# Altium PCB PCB1.PcbDoc
Units mil, origin at the board's own origin, x right, y up, seen from the top; angles counter-clockwise.
Board outline 6000 x 4000 mil, 2 copper layers (Top Layer, Bottom Layer); 18 components, 11 nets, 56 pads, 5 vias.
Unrouted connection lines stored in the file: 17.
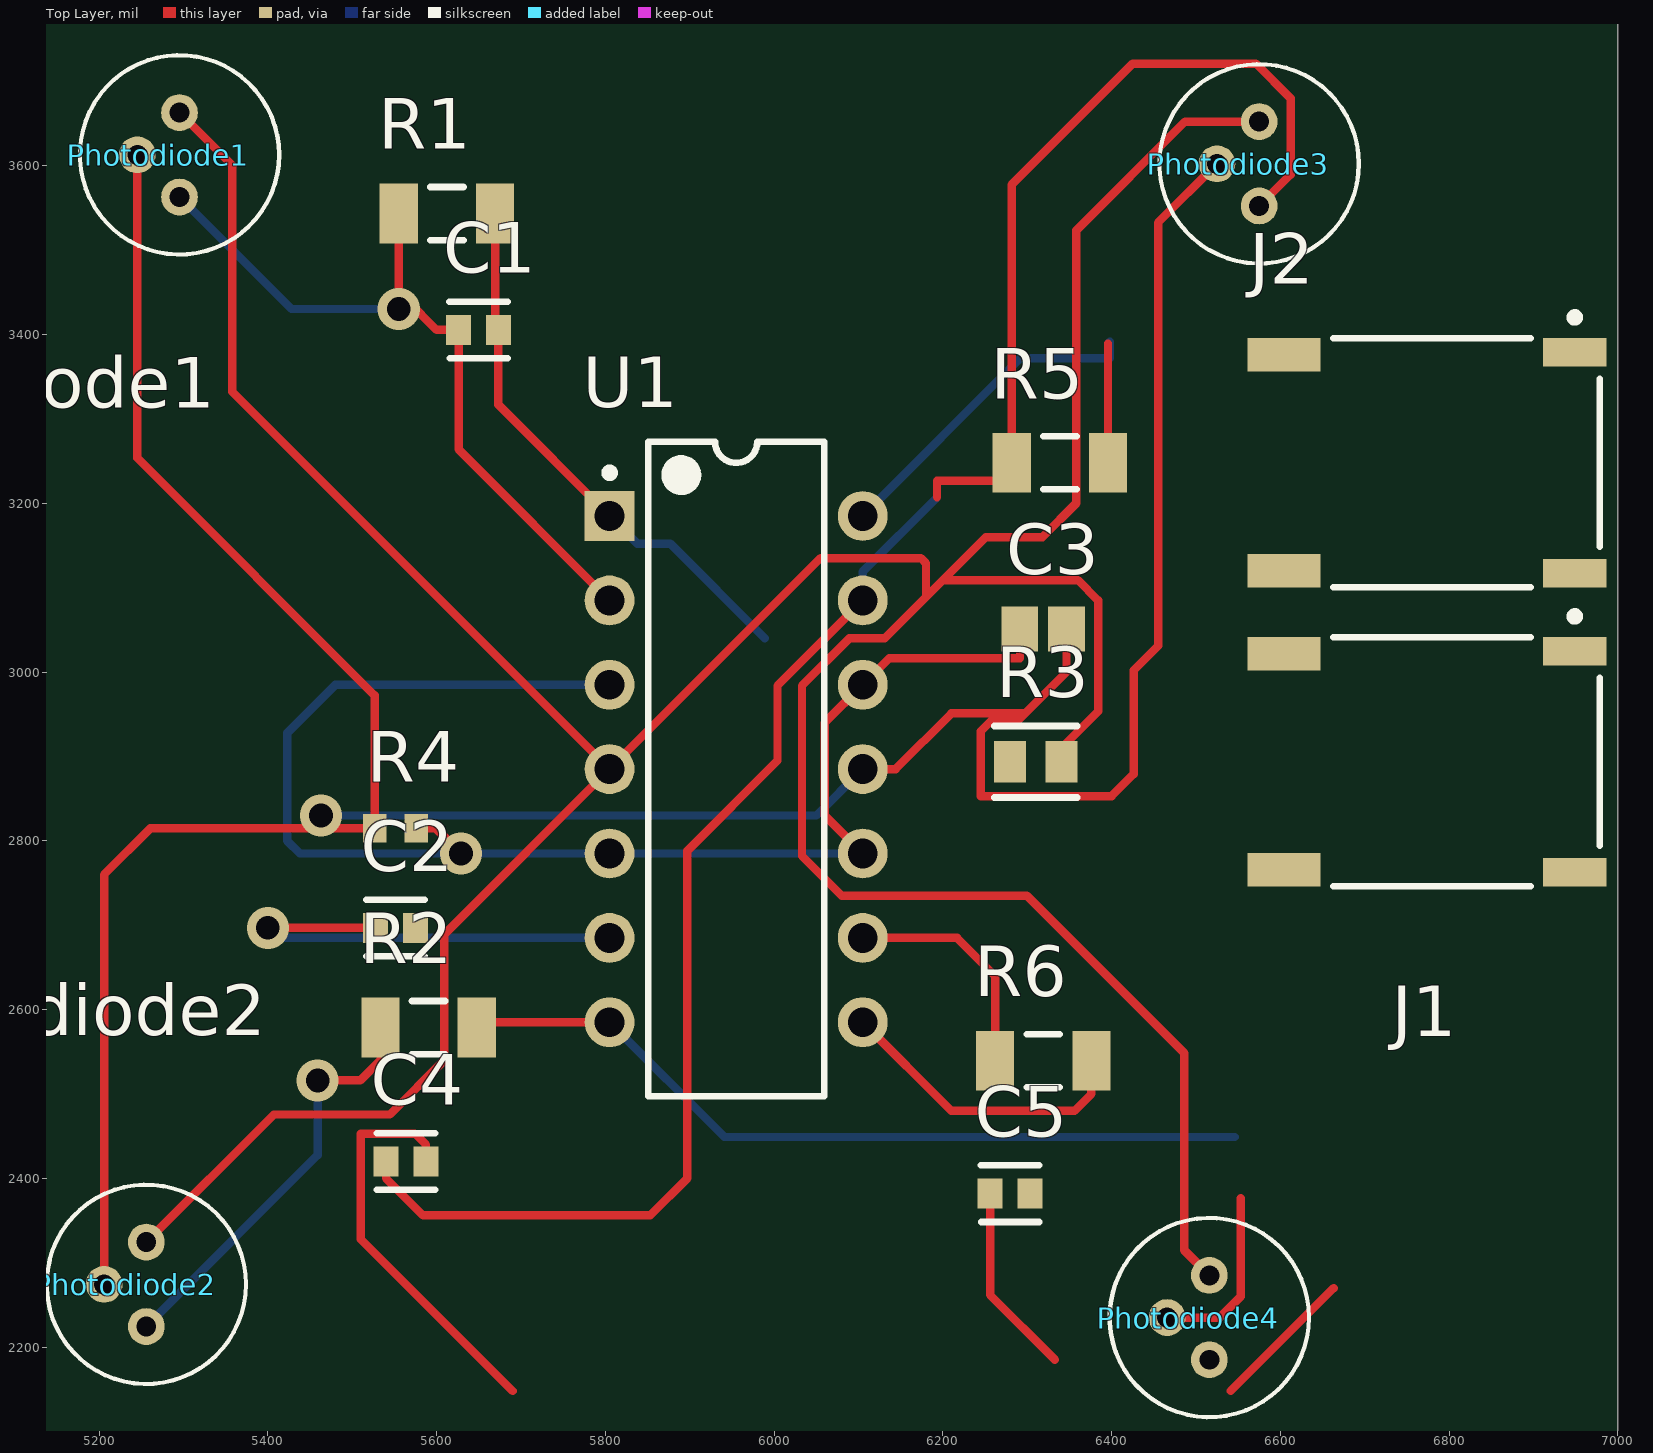
[diagram p0: Top Layer view]
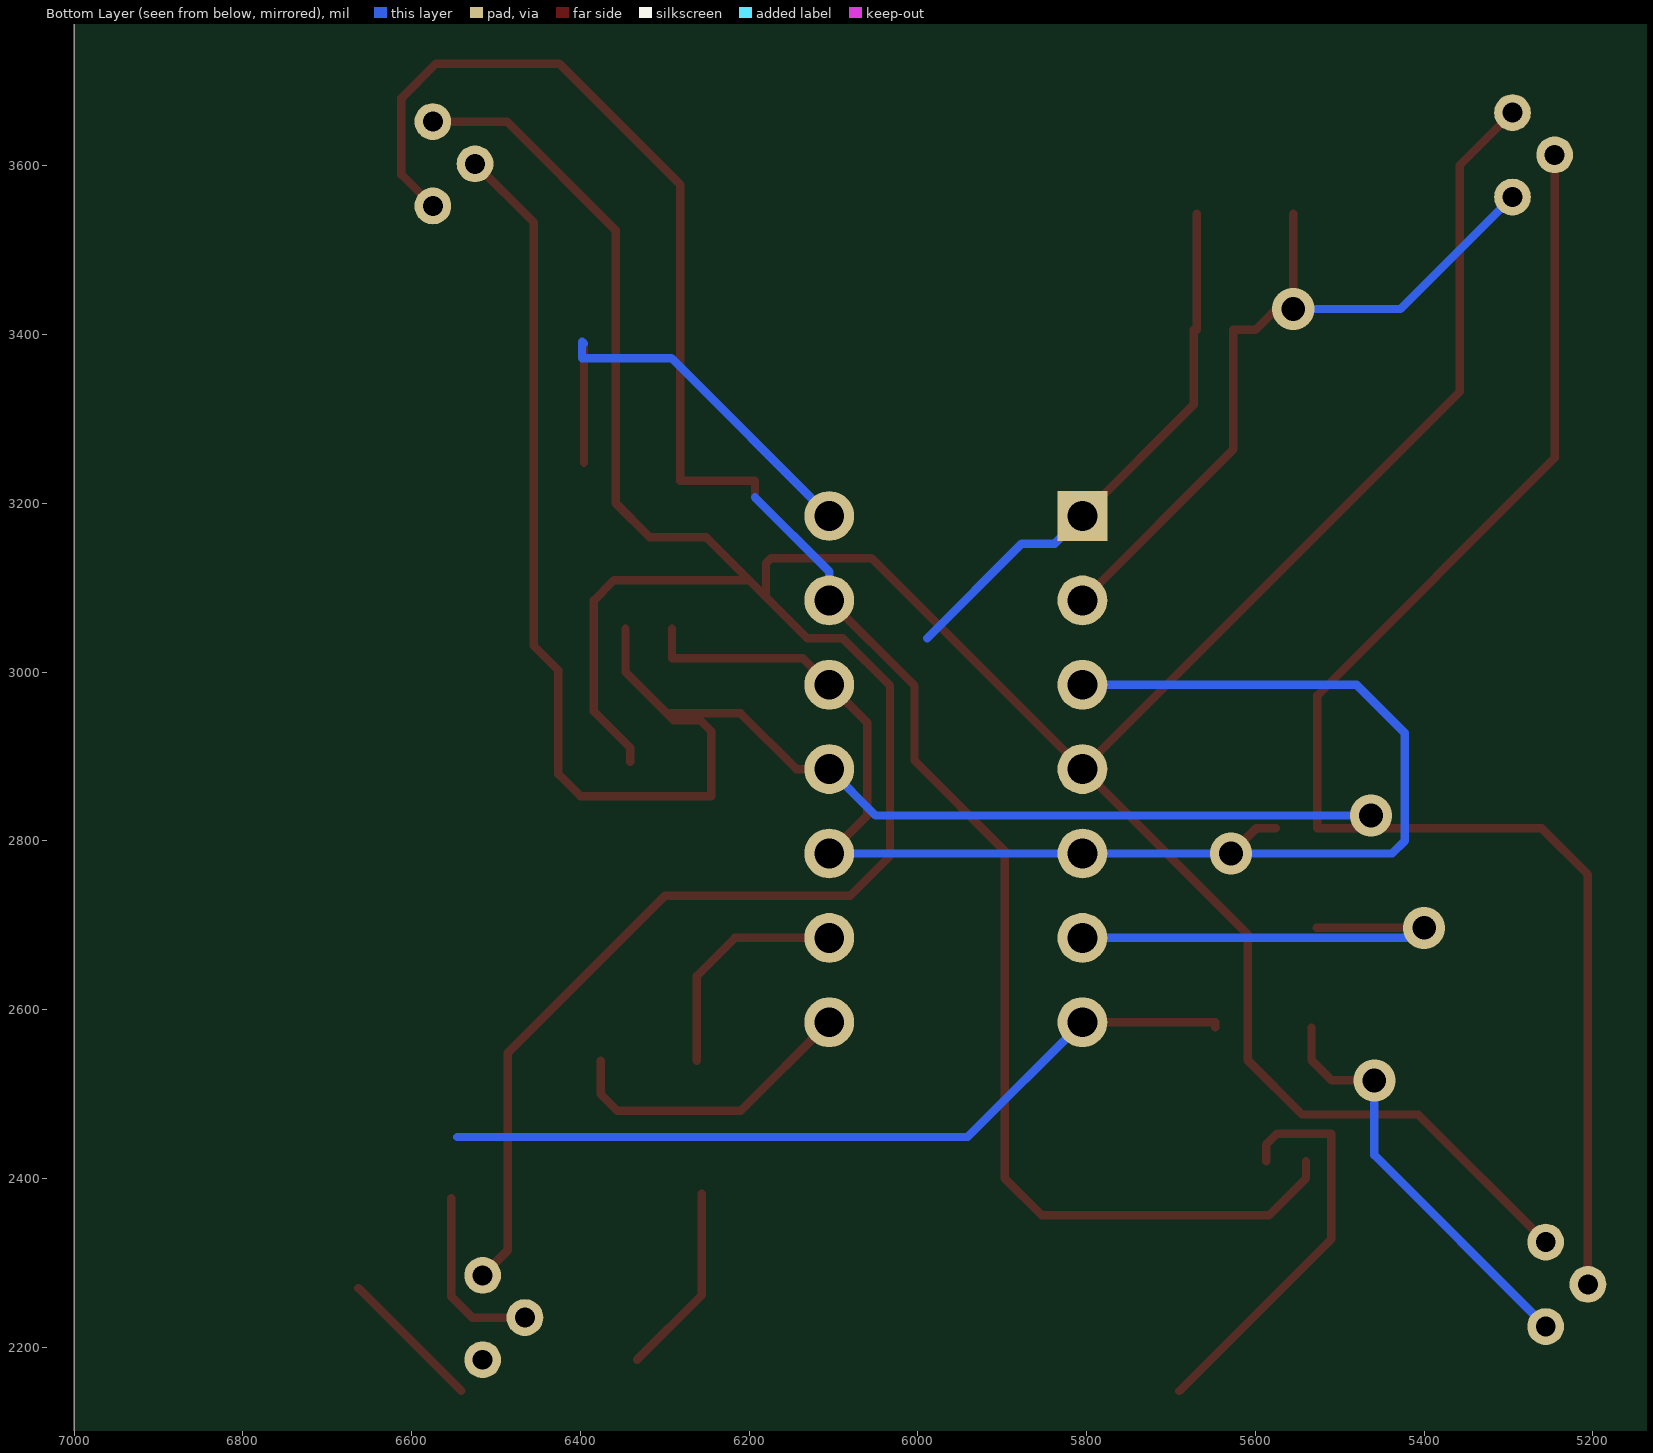
[diagram p1: Bottom Layer view, seen from below]

## Layer stack, top to bottom
Top Solder: solder mask 0.4, Solder Resist, Dk 3.5
Top Layer: signal copper 1.4
Dielectric 1: dielectric 12.6, FR-4, Dk 4.8
Bottom Layer: signal copper 1.4
Bottom Solder: solder mask 0.4, Solder Resist, Dk 3.5

## Board outline
1000,1000 7000,1000 7000,5000 1000,5000

## Design rules (kind name [scope] priority, off if disabled: settings)
Clearance [All] p1: gap=10 ignorepadtopadclearanceinfootprint=FALSE
ComponentClearance [All] p1 off: gap=0 collisioncheckmode=3 verticalgap=0 showdistances=FALSE
Height [All] p1 off: minheight=0 maxheight=1000 prefheight=500
PolygonConnect [All] p1: connectstyle=Relief reliefconductorwidth=10 reliefentries=4 polygonreliefangle="90 Angle" airgapwidth=10
RoutingVias [All] p1: holewidth=28 width=50 viastyle="Through Hole" minholewidth=28 minwidth=50 maxholewidth=28 maxwidth=50
SolderMaskExpansion [All] p1: expansion=4 istentingtop=FALSE
SupplyNets "Schematic Supply Nets_1" [InNet('+5')] p1: voltage=0.000
SupplyNets "Schematic Supply Nets" [InNet('GND')] p2: voltage=0.000
Width [All] p1: maxlimit=10 minlimit=10 preferedwidth=10
28 further rules are at their usual default settings.

## Components (designator, comment, footprint, x,y, rotation, side; value= is the part's Value field where it differs from the comment)
C1 "C0603C339C5GACTU" FP-C0603C-CF-MFG 5649.61,3405.51 r0 top value="3.3 pF"
C2 "C0603C339C5GACTU" FP-C0603C-CF-MFG 5551.18,2696.85 r0 top value="3.3 pF"
C3 "C0805C105K4PACTU" CAPC2013X145X50LL20T25 6318.9,3051.18 r0 top
C4 "C0603C339C5GACTU" FP-C0603C-CF-MFG 5563.62,2420 r0 top value="3.3 pF"
C5 "C0603C339C5GACTU" FP-C0603C-CF-MFG 6279.53,2381.89 r0 top value="3.3 pF"
J1 "SM02B-BHSS-1-TB(LF)(SN)" FP-SM02B-BHSS-1-TB_LF_SN-MFG 6771.65,2893.7 r180 top
J2 "SM02B-BHSS-1-TB(LF)(SN)" FP-SM02B-BHSS-1-TB_LF_SN-MFG 6771.65,3248.03 r180 top
Photodiode1 "S5971" S5971-CASE 5295.28,3612.99 r90 top
Photodiode2 "S5971" S5971-CASE 5255.91,2274.41 r90 top
Photodiode3 "S5971" S5971-CASE 6574.8,3602.36 r90 top
Photodiode4 "S5971" S5971-CASE 6515.75,2235.04 r90 top
R1 "4M7 1% 1206(3216)" RESC1206(3216)_N 5612.21,3543.31 r0 top value="4700000.00 Ohm"
R2 "4M7 1% 1206(3216)" RESC1206(3216)_N 5590.55,2578.74 r0 top value="4700000.00 Ohm"
R3 "ERJ-6ENF1502V" FP-ERJ6EN-IPC_C 6310.06,2893.7 r0 top
R4 "ERJ3EKF2700V" RESC1608X55X30LL15T15 5551.18,2814.96 r0 top
R5 "4M7 1% 1206(3216)" RESC1206(3216)_N 6338.58,3248.03 r0 top value="4700000.00 Ohm"
R6 "4M7 1% 1206(3216)" RESC1206(3216)_N 6318.9,2539.37 r0 top value="4700000.00 Ohm"
U1 "LM324N" N0014A 5955,2885 r0 top

## Footprints (in the part's own frame and the unit in brackets; to place one, negate y for a bottom-side part, rotate by r counter-clockwise, add the part's x,y. Pads: shape width x height; smd on the part's side, far side on the other; paste and mask are expansions set on the pad)
CAPC2013X145X50LL20T25 [mm] "Chip Capacitor, 2-Leads, Body 2.00x1.25mm, IPC High Density"
  rect 1.1x1.35 smd: 1(-0.7,0) 2(0.7,0)
  body extent -1.1,-0.72 1.1,0.72, height 1.45
FP-C0603C-CF-MFG [mm]
  rect 0.75x0.9 smd paste+0 mask+0: 1(-0.6,0) 2(0.6,0)
  silkscreen extent -0.87,-0.85 0.88,0.85, body extent -1.2,-0.6 1.2,0.6, height 0.25
FP-ERJ6EN-IPC_C [mil]
  rect 37.59x49.69 smd paste+0 mask+0: 1(-30.54,0) 2(30.54,0)
  silkscreen extent -49,-42 49,42, body extent -53,-31 53,31, height 10
FP-SM02B-BHSS-1-TB_LF_SN-MFG [mm]
  rect 1.9x0.85 smd paste+0 mask+0: 1(-4.5,-3.325) 2(-4.5,3.325)
  rect 2.2x1 smd paste+0 mask+0: 3(4.25,3.25) 4(4.25,-3.25)
  silkscreen extent -5.25,-4.5 2.77,3.75, body extent -5.55,-3.85 5.45,3.85, height 0.25
N0014A [mm] "DIP, 14-Leads, Body 19.7x6.6mm, Pitch 2.54mm"
  rect 1.5x1.5 hole 0.9: 1(-3.81,7.62)
  round 1.5 hole 0.9: 2(-3.81,5.08) 3(-3.81,2.54) 4(-3.81,0) 5(-3.81,-2.54) 6(-3.81,-5.08) 7(-3.81,-7.62) 8(3.81,-7.62) 9(3.81,-5.08) 10(3.81,-2.54) 11(3.81,0) 12(3.81,2.54) 13(3.81,5.08) 14(3.81,7.62)
  silkscreen extent -3.93,-9.85 2.65,9.85, body extent -3.95,-9.85 3.95,9.85, height 5.08
RESC1206(3216)_N [mm] "Chip Resistor, Body 3.2x1.6mm, IPC Medium Density"
  rect 1.15x1.8 smd: 1(-1.45,0) 2(1.45,0)
  silkscreen extent -0.5,-0.8 0.5,0.8, body extent -1.67,-0.87 1.67,0.87, height 0.75
RESC1608X55X30LL15T15 [mm] "Chip Resistor, 2-Leads, Body 1.60x0.80mm, IPC High Density"
  rect 0.7x0.85 smd: 1(-0.625,0) 2(0.625,0)
  body extent -0.87,-0.48 0.87,0.48, height 0.55
S5971-CASE [mm]
  round 1.108 hole 0.6: P$1(1.27,0) P$2(0,1.27) P$3(-1.27,0)
  silkscreen extent -3,-3 3,3

## Part data
C1 C2 C4 C5: library part CMP-1035-00238-3, "CAP CER 3.3PF 50V NP0 0603", Capacitance="3.3 pF", Manufacturer=KEMET, Package=C0603C-CF, Temperature="-55°C to +125°C", Temperature Characteristic=C0G, Temperature Coefficient=30ppm/°C, Temperature Range High=+125°C, Temperature Range Low=-55°C, Tolerance="0.25 pF", Voltage Rating="50 V", Automotive=Yes, Automotive Grade="Grade 1", Category=Cap, ComponentLink2Description=Datasheet, ComponentLink2URL=https://api.kemet.com/component-edge/download/datasheet/C0603C100J5GACAUTO.pdf, Device Class L1="Passive Components", Device Class L2=Capacitors, Device Class L3="Ceramic Capacitors", Digikey Description="CAP CER 3.3PF 50V NP0 0603", Height=0.87mm, Lead Free=Yes, Manufacturer Part Number=C0603C339C5GACTU, Material=Ceramic, Mouser Description="Multilayer Ceramic Capacitors MLCC - SMD/SMT 50volts 3.3pF C0G 0.25%", Octopart=https://octopart.com/c0603c339c5gactu-kemet-3701205, RoHS=TRUE
C3: library part CMP-1036-04746-2, Manufacturer=Kemet, Part Number=C0805C105K4PACTU
J1 J2: library part CMP-17439-000011-1, "CONN HEADER SMD R/A 2POS 3.5MM", Current Rating=1A, Manufacturer=JST, Temperature="-25°C to +85°C", Temperature Range High=+85°C, Temperature Range Low=-25°C, Voltage Rating=1400V, Automotive=No, Category=Conn, ComponentLink2Description=Datasheet, ComponentLink2URL=http://www.jst-mfg.com/product/pdf/eng/eBHS1.pdf, Conn Gender=Male, Conn Orientation="Right Angle", Contact Material=Tin,Copper, Device Class L1=Connectors, Device Class L2="Headers and Wire Housings", Device Class L3=unset, Digikey Description="CONN HEADER SMD R/A 2POS 3.5MM", Height=3.2mm, Lead Free=Yes, Manufacturer Part Number=SM02B-BHSS-1-TB(LF)(SN), Number Of Contacts=2, Number Of Rows=1, Octopart=https://octopart.com/sm02b-bhss-1-tb%28lf%29%28sn%29-jst-655226, Package=SM02B-BHSS-1-TB(LF)(SN), Pitch=3.5mm, RoHS=TRUE
Photodiode1 Photodiode2 Photodiode3 Photodiode4: "Heat Shrink Tubing, Semi Rigid 0.250 _6.35mm_ 2 to 1 White", Package="TO-18 Hamamatsu", Availability=Unavailable, MF="TE Connectivity", MP=S5971, Price=None, SnapEDA_Link=https://www.snapeda.com/parts/S5971/TE%20Connectivity%20Raychem%20Cable%20Protection/view-part/378018/?ref=snap, TE_purchase_URL=https://www.te.com/usa-en/product-S5971.html?te_bu=Cor&te_type=disp&te_campaign=seda_glo_cor-seda-global-disp-prtnr-fy19-seda-model-bom-cta_sma-317_1&elqCampaignId=32493
R1 R2 R5 R6: library part CMP-1014-00925-1, "4M7 0.25W 1% 1206 (3216 Metric)  SMD", Case-EIA=1206, Case-Metric=3216, Power="0.25 W", Tolerance="1 %", Technology=SMT
R3: library part CMP-2001-04439-3, "RES SMD 15K OHM 1% 1/8W 0805", Case Code (Imperial)=0805, Case Code (Metric)=2012, Max Operating Temperature=155°C, Max Power Dissipation=125mW, Min Operating Temperature=-55°C, Package Quantity=1, Resistance=15kR, Resistance Tolerance=1%, Resistor Type="Thick Film", Temperature Coefficient=100ppm/°C, Voltage Rating=150V, Case/Package=0805, Construction=Rectangular, Contact Plating=Tin, Depth=1.25mm, Features="Automotive AEC-Q200", Height=0.6mm, Lead Free="Lead Free", Length=2mm, Military Standard=Not, Mount="Surface Mount", Number of Pins=2, Number of Terminations=2, Packaging="Tape and Reel", Power Rating=125mW, Radiation Hardening=No, Reach SVHC Compliant=Yes, RoHS Compliant=Yes, Series=ERJ, Size Code=0805, Technology="THICK FILM", Termination=SMD/SMT, Tolerance=1%, Voltage Rating (DC)=150V, Width=1.2mm
R4: library part CMP-2000-00388-1, Manufacturer=Panasonic, Part Number=ERJ3EKF2700V
U1: library part CMP-0055-00082-3, "Low Power Quad Operational Amplifier, 14-pin MDIP", Manufacturer="Texas Instruments", Package Reference=N0014A, PackageTopMarking=NSUZXYYTTE#*LM324N, PowerWise=N, Code_JEDEC=MS-001-AA, ComponentLink1Description="Datasheet URL", ComponentLink1URL=http://www.ti.com/general/docs/lit/getliterature.tsp?genericPartNumber=LM324&fileType=pdf, CompType=Amplifiers, PackageDescription="MDIP, .750 x .250 x.130in, 14 Lead, .100in Pitch", PinCount=14, RoHS=N

## Via types
v1: diameter 50, hole 28, Top Layer to Bottom Layer, 5 vias

## Nets (pads, with @x,y where several pads share a name; then routed paths per layer and width w, separated by ;. In a path a pad name is that pad's centre, name@x,y a point inside that pad or via, vN(x,y) a via of type N, cw(c..) or ccw(c..) an arc to the next point about the centre after c; other vN are vias at no path point)
+5: J2.4 Photodiode1.P$1 Photodiode2.P$1 Photodiode3.P$1 Photodiode4.P$1 R3.2 U1.4 | length 4817.5
  Top Layer w10: Photodiode2.P$1 5407.19,2475.69 5544.69,2475.69 5609,2540 5609,2689 U1.4 ; Photodiode1.P$1 5358,3600.27 5358,3332 U1.4 ; R3.2 6340.6,2910 6384,2953.4 6384,3085 6360,3109 6200,3109 ; Photodiode4.P$1 6486,2314.79 6486,2548.41 6299.41,2735 6080,2735 6033,2782 6033,2984 6089,3040 6131,3040 6180,3089 ; Photodiode3.P$1 6487,3652.36 6358,3523.36 6358,3200 6318,3160 6251,3160 6200,3109 ; U1.4 6055,3135 6174,3135 6180,3129 6180,3089 ; 6180,3089 6200,3109
GND: C3.2 J2.3 Photodiode1.P$2 Photodiode2.P$2 Photodiode3.P$2 Photodiode4.P$2 R4.1 U1.11 | length 4078.1
  Top Layer w10: Photodiode2.P$2 5205.91,2760 5260.87,2814.96 v1@5478.04,2814.96 ; Photodiode1.P$2 5245.28,3253.72 5526.58,2972.42 R4.1 v1@5478.04,2814.96 ; v1(5463,2830) v1@5478.04,2814.96 ; U1.11 6144,2885 6210,2951 6297.46,2951 ; C3.2 6346.46,3000 6297.46,2951 ; Photodiode4.P$2 6528.04,2235.04 6553,2260 6553,2376.39 ; Photodiode3.P$2 6455,3532.56 6455,3031 6426,3002 6426,2879 6400,2853 6245,2853 6245,2930 6258,2943 6289.46,2943 6297.46,2951
  Bottom Layer w10: v1(5463,2830) 6050,2830 U1.11
NetC1_1: C1.1 Photodiode1.P$3 R1.1 U1.2 | length 912
  Top Layer w10: v1(5555.12,3430.27) v1@5555.12,3450.39 ; R1.1 v1@5555.12,3450.39 ; U1.2 5625.98,3264.02 C1.1 5600,3405.51 5565.18,3440.33 v1@5555.12,3450.39
  Bottom Layer w10: Photodiode1.P$3 5428,3430.27 v1(5555.12,3430.27)
NetC2_1: C2.1 Photodiode2.P$3 R2.1 U1.6 | length 1036.3
  Top Layer w10: v1(5400,2696.85) C2.1 ; v1(5459,2516) 5509.47,2516 5533.47,2540 R2.1
  Bottom Layer w10: Photodiode2.P$3 5459,2427.5 v1(5459,2516) ; v1(5400,2696.85) 5411.85,2685 U1.6
NetC3_1: C3.1 R3.1 R4.2 U1.3 U1.5 U1.10 U1.12 | length 1758.7
  Top Layer w10: R4.2 5599,2814.96 v1(5628.96,2785) ; U1.10 6060,2830 6060,2940 U1.12 6136.56,3016.56 6291.34,3016.56 C3.1
  Bottom Layer w10: U1.3 5480,2985 5423,2928 5423,2800 5438,2785 v1(5628.96,2785) U1.5 U1.10
NetC4_1: C4.1 Photodiode3.P$3 R5.1 U1.13 | length 2352
  Top Layer w10: C4.1 5540,2400 5584,2356 5853,2356 5897,2400 5897,2788 6004,2895 6004,2984 U1.13 ; 6193,3207 6193,3226.69 6281.5,3226.69 R5.1 6281.5,3577.5 6425,3721 6571,3721 6612,3680 6612,3589.56 Photodiode3.P$3
  Bottom Layer w10: U1.13 6105,3119 6193,3207
NetC5_1: C5.1 Photodiode4.P$3 R6.1 U1.9 | length 504.8
  Top Layer w10: U1.9 6216.81,2685 6261.81,2640 R6.1 ; C5.1 6255.91,2261.91 6332.77,2185.04
Vout_1: C1.2 J1.1 R1.2 U1.1 | length 660.9
  Top Layer w10: R1.2 5669.29,3405.51 C1.2 5673.23,3316.77 U1.1
  Bottom Layer w10: U1.1 5838,3152 5877,3152 5989,3040
Vout_2: C2.2 J1.2 R2.2 U1.7 | length 961
  Top Layer w10: R2.2 5647.64,2585 U1.7
  Bottom Layer w10: U1.7 5941,2449 6546,2449
Vout_3: C5.2 J1.3 R6.2 U1.8 | length 362.1
  Top Layer w10: U1.8 6210,2480 6355.98,2480 6375.98,2500 R6.2
Vout_4: C4.2 J1.4 R5.2 U1.14 | length 1189.5
  Top Layer w10: C4.2 5587.24,2440 5574.24,2453 5510,2453 5510,2328 5690,2148 ; R5.2 6395.67,3389.35 ; 6541,2148 6663,2270
  Bottom Layer w10: U1.14 6292,3372 6398,3372 6398,3391.69 6395.67,3389.35
pads on no net: J2.1 J2.2

## Text inside footprints (layer, text, board x,y; h text height)
Photodiode1: Top 3D Body "3.6mm case height" at 5195.15,3763.18 h50.06 r90
Photodiode2: Top 3D Body "3.6mm case height" at 5155.78,2424.6 h50.06 r90
Photodiode3: Top 3D Body "3.6mm case height" at 6474.68,3752.55 h50.06 r90
Photodiode4: Top 3D Body "3.6mm case height" at 6415.62,2385.23 h50.06 r90